# Altium PCB ValkyrieSHD_PCB.PcbDoc
Units mm, origin at the board's own origin, x right, y up, seen from the top; angles counter-clockwise.
Board outline 59.05 x 53.34 mm, 2 copper layers (Top, Bottom), stack 1.669 mm thick; 46 components, 34 nets, 189 pads, 340 vias.
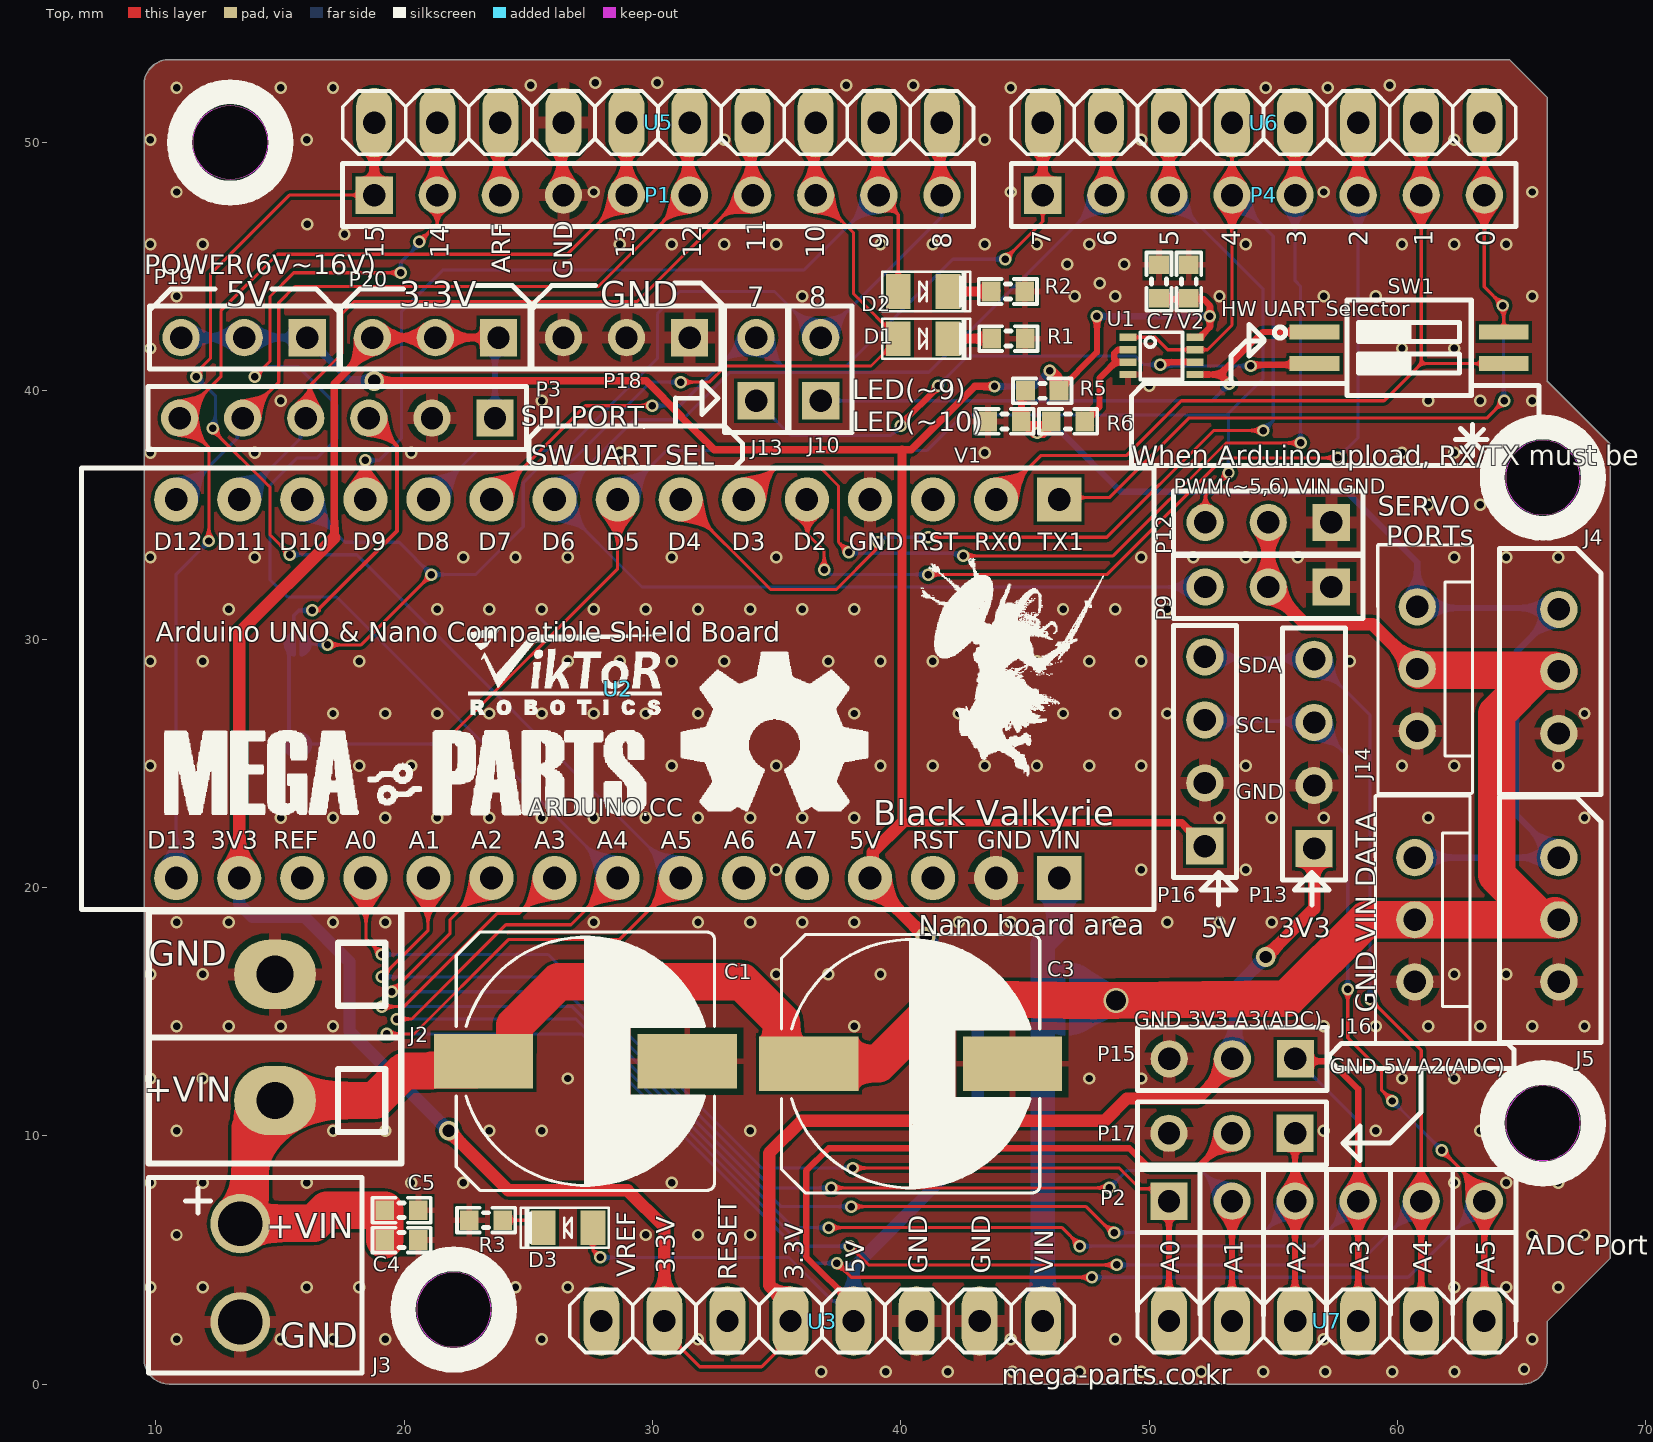
[diagram p0: Top view]
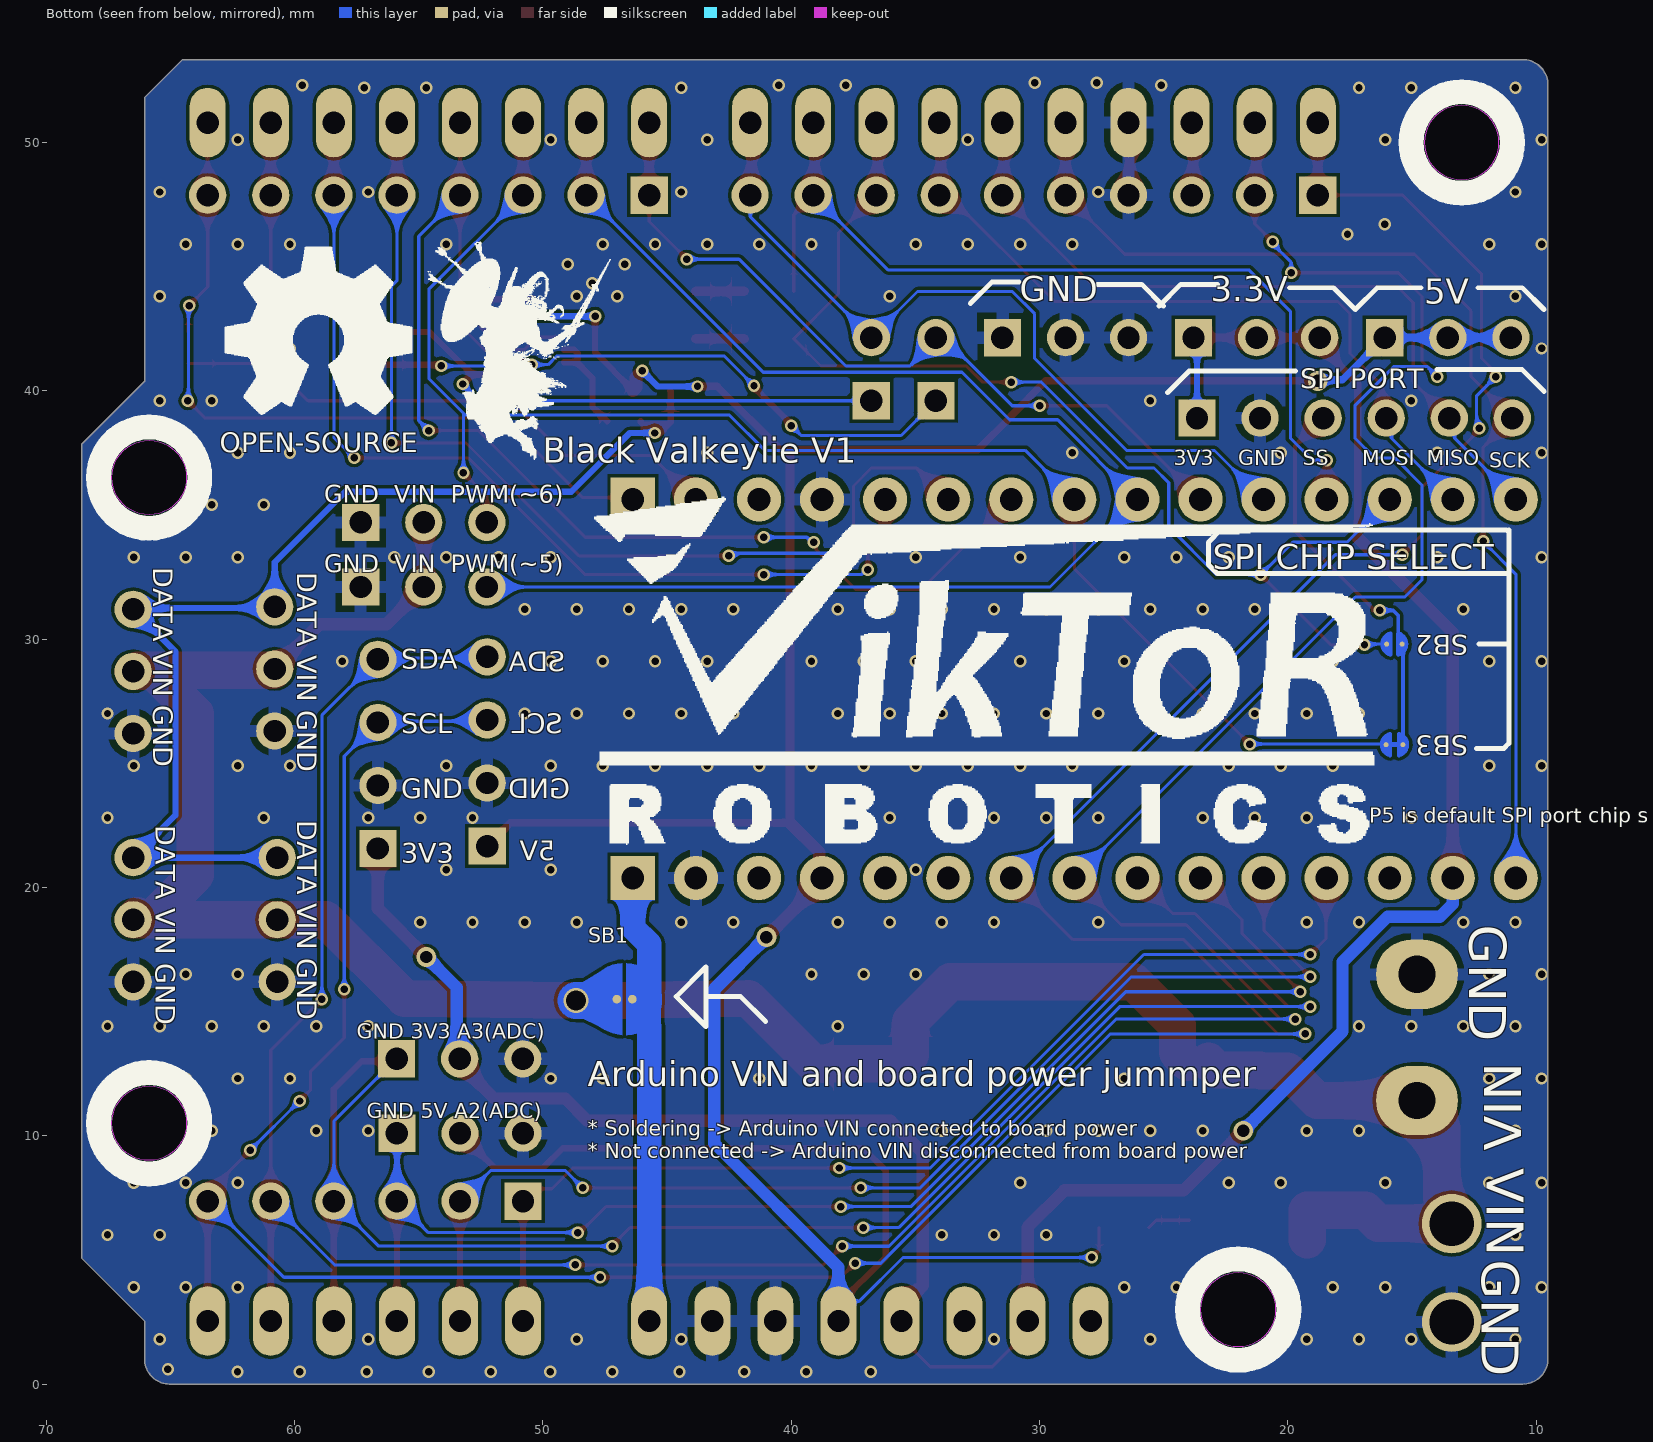
[diagram p1: Bottom view, seen from below]

## Layer stack, top to bottom
Solder Mask Top: solder mask 0.0102, Solder Resist, Dk 3.5
Top: signal copper 0.0343
Dielectric 1: dielectric 1.6, FR-4, Dk 4.3
Bottom: signal copper 0.0343
Solder Mask Bottom: solder mask 0.0102, Solder Resist, Dk 3.5

## Board outline
9.527,1.016 9.527,52.349 9.526,52.324 cw(c10.542,52.324) 10.542,53.34 64.516,53.34 66.04,51.816 66.04,40.386 68.58,37.846 68.58,5.08 66.04,2.54 66.04,1.016 cw(c65.037,1.003) 65.049,0 10.543,0 cw(c10.543,1.016)
cut-out: 13,48.5 cw(c13,50) 11.5,50 cw(c13,50) 13,51.5 cw(c13,50) 14.5,50 cw(c13,50)
cut-out: 20.5,3 ccw(c22,3) 22,1.5 ccw(c22,3) 23.5,3 ccw(c22,3) 22,4.5 ccw(c22,3)
cut-out: 64.358,36.506 ccw(c65.858,36.506) 65.858,35.006 ccw(c65.858,36.506) 67.358,36.506 ccw(c65.858,36.506) 65.858,38.006 ccw(c65.858,36.506)
cut-out: 64.358,10.506 ccw(c65.858,10.506) 65.858,9.006 ccw(c65.858,10.506) 67.358,10.506 ccw(c65.858,10.506) 65.858,12.006 ccw(c65.858,10.506)

## Design rules (kind name [scope] priority, off if disabled: settings)
Clearance "Clearance - Default - DEFAULT - Net" [All] p1: gap=0.127 ignorepadtopadclearanceinfootprint=FALSE except(0: Arc-Text Track-Text SMDPad-Text SMDPad-Hole THPad-Text THPad-Hole Via-Text Via-Hole Fill-Text Poly-Text Region-Text Text-Text Text-Hole)
ComponentClearance "ComponentClearance - Default - DEFAULT" [All] p1: gap=0.152 collisioncheckmode=3 verticalgap=0.254 showdistances=FALSE
FanoutControl Fanout_Small [(CompPinCount < 5)] p3: bgadir=Out bgaviamode=Centered fanoutstyle=Auto fanoutdirection=OutThenIn viagrid=0.025 // Fanout_Small (Default Rule)
FanoutControl Fanout_SOIC [IsSOIC] p4: bgadir=Out bgaviamode=Centered fanoutstyle=Auto fanoutdirection=Alternating viagrid=0.025 // Fanout_SOIC (Default Rule)
HoleSize [All] p1: absolutevalues=TRUE maxlimit=5 minlimit=0.1 maxpercent=80.000 minpercent=20.000
HoleToHoleClearance "HoleToHoleClearance - Default - DEFAULT" [All] p1: gap=0 allowstackedmicrovias=TRUE
Length "Default Length" [All] p1: maxlimit=1270 minlimit=0
MaxMinImpedance "Default Impedance" [All] p1: minimum=50.00 maximum=150.0
MinimumSolderMaskSliver [All] p1: minsoldermaskwidth=0
ParallelSegment "Default Parallel Segment Adjasent" [All] p1: limit=25.4 gap=5.08
ParallelSegment "Default Parallel Segment Same Layer" [All] p2: limit=25.4 gap=5.08
PlaneConnect "Default PlaneConnect" [All] p1: planeconnectstyle=Relief reliefexpansion=0.508 reliefentries=4 reliefconductorwidth=1 reliefairgap=0.254
PolygonConnect "PolygonConnect - Default Pad" [All] p1: thpad.connectstyle=Relief thpad.reliefconductorwidth=0.508 thpad.reliefentries=4 thpad.polygonreliefangle="90 Angle" thpad.airgapwidth=0.254 smdpad.connectstyle=Relief smdpad.reliefconductorwidth=0.254 smdpad.reliefentries=4 smdpad.polygonreliefangle="90 Angle" smdpad.airgapwidth=0.254 via.connectstyle=Direct via.reliefconductorwidth=1 via.reliefentries=4 via.polygonreliefangle="45 Angle" via.airgapwidth=0.254
RoutingLayers "RoutingLayers - Default - DEFAULT" [All] p1: top layer_v5=TRUE bottom layer_v5=TRUE
RoutingPriority "RoutingPriority - Default - DEFAULT" [All] p1: routingpriority=3
RoutingTopology "Default Routing Topology" [All] p1: topology=Shortest
RoutingVias "RoutingVias - Default - DEFAULT" [All] p1: holewidth=0.3 width=0.5 viastyle="Through Hole" minholewidth=0.1 minwidth=0.5 maxholewidth=2 maxwidth=5
SMDToCorner "SMDToCorner - Default - DEFAULT" [All] p1: distance=60000
ShortCircuit [InNet('NetP3_3')] p1: allowed=TRUE
SilkToSilkClearance [All] p1: silktosilkclearance=0
SilkToSolderMaskClearance [IsPad] p1: minsilkscreentomaskgap=0 clearancetoexposedcopper=TRUE
SolderMaskExpansion [All] p1: expansion=0.102 istentingtop=FALSE
Width "Default Width" [All] p1: maxlimit=5 minlimit=0.1 preferedwidth=0.127
17 further rules are at their usual default settings.

## Components (designator, comment, footprint, x,y, rotation, side; value= is the part's Value field where it differs from the comment)
C1 "330uF/35V(10W10.5H)" SMD-C(10.0) 27.3,13 r90 top locked
C3 "330uF/35V(10W10.5H)" SMD-C(10.0) 40.4,12.9 r90 top locked
C4 "CAP-CHIP-2012" CAPC1608X06L 19.9,5.8 r180 top value=100nF/50V
C5 "CAP-CHIP-1005" CAPC1608X06L 19.9,7 r180 top value=100nF/50V
C7 "CAP-CHIP-1005" CAPC1608X06L 50.4,44.4 r270 top value=100nF/50V
D1 "LED(BLUE)1608" LED2012-LJS 40.9,42.1 r0 top
D2 "LED(BLUE)1608" LED2012-LJS 40.9,44 r0 top
D3 "LED(GREEN)1608" LED2012-LJS 26.6,6.3 r180 top
J2 "Header 2" BLOCK-5.08MMX2P 14.8,11.42 r90 top locked
J3 "YAW396-02" NW-VH3.96-2A 13.4,4.48 r270 top value=YAW396-02V
J4 "5268-03A" 5267-03 66.5,28.7 r270 top
J5 "5268-03A" 5267-03 66.5,18.7 r270 top
J10 "JUMPER" HDR1X2 36.775,39.6 r90 top
J13 "JUMPER" HDR1X2 34.175,39.6 r90 top
J14 "JST B3B-EH-A" JST_B3B-EH-A 60.8,28.8 r270 top
J16 "JST B3B-EH-A" JST_B3B-EH-A 60.7,18.7 r270 top
P1 "MHDR1X10" HDR1X10 18.796,47.879 r0 top
P2 "Header 6" HDR1X6 50.8,7.366 r0 top
P3 "Header 6" HDR1X6 23.66,38.9 r180 top
P4 "Header 8" HDR1X8 45.72,47.879 r0 top
P9 "Header 3" HDR1X3 57.34,32.1 r180 top
P12 "Header 3" HDR1X3 57.34,34.7 r180 top
P13 "Header 4" HDR1X4 56.645,21.565 r90 top
P15 "Header 3" HDR1X3 55.892,13.1 r180 top
P16 "Header 4" HDR1X4 52.245,21.665 r90 top
P17 "Header 3" HDR1X3 55.88,10.1 r180 top locked
P18 "Header 3" HDR1X3 31.496,42.14 r180 top
P19 "Header 3" HDR1X3 16.1,42.14 r180 top
P20 "Header 3" HDR1X3 23.798,42.14 r180 top
R1 "1K/1608" RESC1608X06L 44.337,42.1 r180 top
R2 "1K/1608" RESC1608X06L 44.315,44 r180 top
R3 "2K/1608" RESC1608X06L 23.3,6.6 r0 top
R5 "RES-CHIP-1005" RESC1608X06L 45.7,40 r0 top value=10kΩ/1005/J
R6 "33R/1608" RESC1608X06L 46.74,38.769 r180 top
SB1 "Jumper" Solderbridge_3pi 46.4,15.5 r0 bottom (schematic designator W1)
SB2 "Jumper" Solderbridge 16.025,29.8 r180 bottom
SB3 "Jumper" Solderbridge_Shorted 16.045,25.749 r180 bottom
SW1 "SW_DIP-2_0" SW-SMD2P 56.675,42.35 r270 top value="SW DIP-2"
U1 "NC7WZ241" MO-187_0.5_2.0X3.1 49.149,42.156 r270 top
U2 "Arduino Nano As component" ARDUINO_NANO_BOARD 28.6,28 r0 top locked
U3 "J_8X1" J_8X1 36.83,2.54 r0 top locked
U5 "J_10X1" J_10X1 30.226,50.8 r0 top locked
U6 "J_8X1" J_8X1 54.61,50.8 r0 top locked
U7 "J_6X1" J_6X1 57.15,2.54 r0 top locked
V1 "IECS0505C040FR" RESC1608X06L 44.183,38.769 r0 top
V2 "IECS0505C040FR" RESC1608X06L 51.6,44.4 r270 top

## Footprints (in the part's own frame and the unit in brackets; to place one, negate y for a bottom-side part, rotate by r counter-clockwise, add the part's x,y. Pads: shape width x height; smd on the part's side, far side on the other; paste and mask are expansions set on the pad)
5267-03 [mm]
  round 1.5 hole 0.9: 1(-2.5,0) 2(0,0) 3(2.5,0)
  silkscreen extent -4.95,-2.38 4.95,1.7, body extent -4.98,-3.15 4.93,1.76, height 5.95
ARDUINO_NANO_BOARD [mil] "Nano Board as Component"
  rect 70x70 / inner round 64.67 / far side rect 70x70 hole 36: 1(700,-300) 30(700,300)
  round 70 hole 36: 2(600,-300) 3(500,-300) 4(400,-300) 5(300,-300) 6(200,-300) 7(100,-300) 8(0,-300) 9(-100,-300) 10(-200,-300) 11(-300,-300) 12(-400,-300) 13(-500,-300) 14(-600,-300) 15(-700,-300) 16(-700,300) 17(-600,300) 18(-500,300) 19(-400,300) 20(-300,300) 21(-200,300) 22(-100,300) 23(0,300) 24(100,300) 25(200,300) 26(300,300) 27(400,300) 28(500,300) 29(600,300)
  silkscreen extent -850,-350 850,350
BLOCK-5.08MMX2P [mil]
  oval 110x130 hole 59.06: 1(0,0) 2(200,0)
  silkscreen extent -100,-200 300,200, body extent -107,-197 308,205, height 567
CAPC1608X06L [mm]
  rect 0.75x0.8 smd: 1(-0.675,0) 2(0.675,0)
  silkscreen extent -1.17,-0.5 1.17,0.5, body extent -0.8,-0.43 0.8,0.43, height 0.8
HDR1X2 [mm] "Connector; Header; 2 Position"
  rect 1.5x1.5 hole 0.9: 1(0,0)
  round 1.5 hole 0.9: 2(2.54,0)
  silkscreen extent -1.27,-1.27 3.81,1.27
HDR1X3 [mm] "Connector; Header; 3 Position"
  rect 1.5x1.5 hole 0.9: 1(0,0)
  round 1.5 hole 0.9: 2(2.54,0) 3(5.08,0)
  silkscreen extent -1.27,-1.27 6.35,1.27
HDR1X4 [mm] "Connector; Header; 4 Position"
  rect 1.5x1.5 hole 0.9: 1(0,0)
  round 1.5 hole 0.9: 2(2.54,0) 3(5.08,0) 4(7.62,0)
  silkscreen extent -1.27,-1.27 8.89,1.27
HDR1X6 [mm] "Connector; Header; 6 Position"
  rect 1.5x1.5 hole 0.9: 1(0,0)
  round 1.5 hole 0.9: 2(2.54,0) 3(5.08,0) 4(7.62,0) 5(10.16,0) 6(12.7,0)
  silkscreen extent -1.27,-1.27 13.97,1.27
HDR1X8 [mm] "Connector; Header; 8 Position"
  rect 1.5x1.5 hole 0.9: 1(0,0)
  round 1.5 hole 0.9: 2(2.54,0) 3(5.08,0) 4(7.62,0) 5(10.16,0) 6(12.7,0) 7(15.24,0) 8(17.78,0)
  silkscreen extent -1.27,-1.27 19.05,1.27
HDR1X10 [mm] "Connector; Header; 10 Position"
  rect 1.5x1.5 hole 0.9: 1(0,0)
  round 1.5 hole 0.9: 2(2.54,0) 3(5.08,0) 4(7.62,0) 5(10.16,0) 6(12.7,0) 7(15.24,0) 8(17.78,0) 9(20.32,0) 10(22.86,0)
  silkscreen extent -1.27,-1.27 24.13,1.27
J_6X1 [mm]
  oval 1.45x2.8 hole 0.9: 1(-6.35,0) 2(-3.81,0) 3(-1.27,0) 4(1.27,0) 5(3.81,0) 6(6.35,0)
  silkscreen extent -7.62,-1.27 7.62,1.27
J_8X1 [mm]
  oval 1.45x2.8 hole 0.9: 1(-8.89,0) 2(-6.35,0) 3(-3.81,0) 4(-1.27,0) 5(1.27,0) 6(3.81,0) 7(6.35,0) 8(8.89,0)
  silkscreen extent -10.16,-1.27 10.16,1.27
J_10X1 [mm]
  oval 1.45x2.8 hole 0.9: 1(-11.43,0) 2(-8.89,0) 3(-6.35,0) 4(-3.81,0) 5(-1.27,0) 6(1.27,0) 7(3.81,0) 8(6.35,0) 9(8.89,0) 10(11.43,0)
  silkscreen extent -12.7,-1.27 12.7,1.27
JST_B3B-EH-A [mm] "2.5mm pitch"
  round 1.5 hole 0.9: 1(-2.5,0) 2(0,0) 3(2.5,0)
  silkscreen extent -5,-1.6 5.01,2.22, body extent -4.99,-1.6 5.01,2.2, height 6
LED2012-LJS [mm]
  rect 1x1.4 smd: 1(1,0) 2(-1,0)
  silkscreen extent -1.65,-0.8 1.9,0.8, body extent -1.43,-0.65 1.4,0.65, height 1
MO-187_0.5_2.0X3.1 [mm]
  rect 0.3x0.7 smd mask+0.01: 1(0,0) 2(0.5,0) 3(1,0) 4(1.5,0) 5(1.5,2.7) 6(1,2.7) 7(0.5,2.7) 8(0,2.7)
  silkscreen extent -0.2,0.5 1.7,2.2, body extent -0.43,0.35 1.88,2.35, height 0.9
NW-VH3.96-2A [mm]
  round 2.4 hole 1.8: 1(-1.98,0) 2(1.98,0)
  silkscreen extent -3.83,-3.7 4.03,4.9, body extent -3.8,-3.7 4.06,4.9, height 13.7
RESC1608X06L [mm]
  rect 0.75x0.8 smd: 1(-0.675,0) 2(0.675,0)
  silkscreen extent -1.17,-0.5 1.17,0.5, body extent -0.8,-0.48 0.8,0.48, height 0.8
SMD-C(10.0) [mm]
  rect 2.2x4 smd: 1(0,4.1) 2(0,-4.1)
  silkscreen extent -5.2,-5.2 5.2,5.2, body extent -4.25,-4.45 4.05,4.45, height 10.5
Solderbridge [mm]
  round 0.2 smd paste-10: 1(0,0) 2(0.625,0)
  Top region: 0.389,0.432 0.465,0.505 0.583,0.467 0.648,0.424 0.721,0.351 0.775,0.292 0.833,0.193 0.861,0.099 0.856,-0.122 0.831,-0.193 0.747,-0.33 0.663,-0.411 0.571,-0.469 0.47,-0.5 0.419,-0.483 0.389,-0.43
  Top region: 0.236,-0.432 0.16,-0.505 0.042,-0.467 -0.023,-0.424 -0.097,-0.351 -0.15,-0.292 -0.208,-0.193 -0.236,-0.099 -0.231,0.122 -0.206,0.193 -0.122,0.33 -0.038,0.411 0.054,0.469 0.155,0.5 0.206,0.483 0.236,0.43
  Top lines w0.152: 0.465,-0.431 ccw(c0.355,0) 0.582,-0.382 ccw(c0.355,0) 0.774,0.149 ccw(c0.355,0) 0.465,0.431 ; 0.159,-0.431 cw(c0.27,0) -0.175,0 cw(c0.27,0) 0.025,0.371 cw(c0.27,0) 0.159,0.431
Solderbridge_3pi [mm]
  round 0.35 smd paste-10: 1(0,0) 2(0.625,0)
  Top region: 0.215,-1.446 -0.482,-1.232 -0.987,-0.705 -1.172,0.001 -0.989,0.707 -0.486,1.235 0.211,1.451 0.211,1.451 0.215,1.447
  Top region: 0.398,-1.454 0.398,1.439 0.402,1.443 1.099,1.227 1.602,0.699 1.785,-0.007 1.6,-0.713 1.095,-1.24 0.398,-1.454
  Top lines w0.012: 0.211,1.451 ccw(c0.278,0.003) -0.5,1.226 ccw(c0.278,0.003) -0.68,1.091 ccw(c0.278,0.003) -0.68,-1.085 ccw(c0.278,0.003) -0.486,-1.23 ccw(c0.278,0.003) 0.215,-1.446 ; 0.398,-1.454 ccw(c0.335,-0.005) 1.784,0.05 ccw(c0.335,-0.005) 0.402,1.443
  Top lines w0.013: 0.215,1.447 0.215,0.668 0.215,-0.765 0.215,-1.446 ; 0.398,1.439 0.398,-1.454
  Top lines w1: -0.351,0.722 ccw(c0.335,-0.005) -0.425,-0.656 ccw(c0.335,-0.005) -0.315,-0.765 ; 0.937,-0.764 ccw(c0.287,-0.004) 1.284,0.081 ccw(c0.287,-0.004) 0.973,0.724
Solderbridge_Shorted [mm]
  round 0.2 smd paste-10: 1(0,0) 2(0.676,0)
  Top region: 0.44,0.432 0.516,0.505 0.634,0.467 0.699,0.424 0.772,0.351 0.826,0.292 0.884,0.193 0.912,0.099 0.907,-0.122 0.881,-0.193 0.798,-0.33 0.714,-0.411 0.622,-0.469 0.521,-0.5 0.47,-0.483 0.44,-0.43
  Top region: 0.236,-0.432 0.16,-0.505 0.042,-0.467 -0.023,-0.424 -0.097,-0.351 -0.15,-0.292 -0.208,-0.193 -0.236,-0.099 -0.231,0.122 -0.206,0.193 -0.122,0.33 -0.038,0.411 0.054,0.469 0.155,0.5 0.206,0.483 0.236,0.43
  Top lines w0.152: 0.516,-0.431 ccw(c0.406,0) 0.516,0.431 ; 0.159,-0.431 cw(c0.27,0) -0.175,0 cw(c0.27,0) -0.174,0.025 cw(c0.27,0) 0.159,0.431
  Top lines w0.203: 0.676,0 0,0
SW-SMD2P [mm]
  rect 0.6x2 smd: 1(-0.015,-0.01) 2(1.255,-0.01) 3(1.255,7.61) 4(-0.015,7.61)
  silkscreen extent -1.3,-1.62 2.54,6.3

## Part data
C1 C3: library part C_10/16, PCB PartLoc=MM,59.125,55,90,1, PCB RefLoc=MM,7.625,-5.625,180,CC,1.2,1,0.12,std,1
D1 D2 D3: library part D:LED, "LED SMARTLED GREEN 570NM 0603"
J2: "Header, 2-Pin", LatestRevisionDate=17-Jul-2002, LatestRevisionNote="Re-released for DXP Platform.", Publisher="Altium Limited"
J10 J13: library part JUMPER_2P, PCB DECAL=5267-03
J14 J16: library part 5268-03A
P1: "Header, 10-Pin", LatestRevisionDate=17-Jul-2002, LatestRevisionNote="Re-released for DXP Platform.", Publisher="Altium Limited"
P2 P3: "Header, 6-Pin", LatestRevisionDate=17-Jul-2002, LatestRevisionNote="Re-released for DXP Platform.", Publisher="Altium Limited"
P4: "Header, 8-Pin", LatestRevisionDate=17-Jul-2002, LatestRevisionNote="Re-released for DXP Platform.", Publisher="Altium Limited"
P9 P12 P15 P17 P18 P19 P20: "Header, 3-Pin", LatestRevisionDate=17-Jul-2002, LatestRevisionNote="Re-released for DXP Platform.", Publisher="Altium Limited"
P13 P16: "Header, 4-Pin", LatestRevisionDate=17-Jul-2002, LatestRevisionNote="Re-released for DXP Platform.", Publisher="Altium Limited"
R1 R2 R3 R6: library part RES_0603, "Not mounted"
SB1 SB2 SB3: "Jumper Wire", LatestRevisionDate=17-Jul-2002, LatestRevisionNote="Re-released for DXP Platform.", PackageDescription="Radial Cap, Thru-Hole; 2 Leads; 0.2 in Pin Spacing", PackageReference=RAD-0.2, Published=24-Mar-1999, Publisher="Altium Limited"
U2: library part ArduinoNano
U3 U6: library part J_8x1, PCB Footprint=J_8x1
U5: library part J_10x1, PCB Footprint=J_10x1
U7: library part J_6x1, PCB Footprint=J_6x1
V1 V2: library part "DIODE TVS_1"
C4 C5 C7 R5: PCB DECAL=1005, size=1005
J3: PCB DECAL=YAW396-02V
SW1: PCB DECAL=SW-SMD2P, Source_Path=\\192.168.10.135\STAFF2\I13-0002_EM-IMX6\TRUNK\HW\SCH\EM-IMX6-CORE-V10R0(130225).DSN

## Via types
v1: diameter 0.5, hole 0.3, Top to Bottom, tented both sides, 335 vias
v2: diameter 0.8, hole 0.5, Top to Bottom, tented both sides, 4 vias
v3: diameter 1, hole 0.8, Top to Bottom, tented both sides, 1 vias

## Nets (pads, with @x,y where several pads share a name; then routed paths per layer and width w, separated by ;. In a path a pad name is that pad's centre, name@x,y a point inside that pad or via, vN(x,y) a via of type N, cw(c..) or ccw(c..) an arc to the next point about the centre after c; other vN are vias at no path point)
+3V3: P3.1 P13.1 P15.2 P20.1 P20.2 P20.3 U2.14 U3.2 U3.4 | length 105.9
  Top w0.127: U3.2 30.48,2.12 31.9,0.7 34.395,0.7 35.56,1.865 U3.4@35.56,2.203
  Top w0.3: 17.19,34.09 17.19,40.29 18.718,41.818 P20.3 P20.2 P20.1
  Top w0.5: U2.14 13.36,30.26 17.19,34.09 ; v2(21.8,10.2) 24.2,7.8 29,7.8 30.48,6.32 U3.2 ; U3.4@35.56,2.203 U3.4 35.56,3.124 34.7,3.984 34.7,9.3 36,10.6 48.2,10.6 49.1,11.5 51.96,11.5 P15.2@53.46,13 ; v2(54.7,17.2) 56.645,19.145 P13.1
  Bottom w0.254: P3.1 23.66,42.001 P20.1
  Bottom w0.5: U2.14 13.361,20.379 13.361,19.339 13.88,18.82 15.98,18.82 17.8,17 17.8,14.2 v2(21.8,10.2) ; P15.2@53.46,13 53.47,13.01 53.47,15.97 v2(54.7,17.2)
+5V: C7.2 D3.2 P16.1 P17.2 P19.1 P19.2 P19.3 R5.2 U1.8 U2.4 U3.5 V2.2 | length 140.8
  Top w0.127: D3.2 27.6,5.4 v1(27.9,5.1)
  Top w0.254: U3.5 38.1,3.215 36.2,5.115 36.2,8.602 37.098,9.5 49.2,9.5 50,8.7 51.94,8.7 P17.2 ; R5.2 46.375,40.025 47.9,41.55 v1(47.9,43) ; C7.2 50.437,43.688 52.197,43.688 52.451,43.434 v1(52.451,42.996) 52.451,42.558 52.057,42.164 U1.8@52.009,42.164
  Top w0.3: v2(18.8,40.4) 29.745,40.4 31.167,38.978 31.167,38.946 32.493,37.62 40.05,37.62 40.42,37.62 42.975,40.175 v1(43.775,40.175) ; 40.05,22.6 51.31,22.6 P16.1
  Top w0.35: 40.05,22.6 40.05,37.62
  Top w0.5: U2.4 38.871,20.491 38.871,21.421 40.05,22.6 ; U2.4@38.78,20.38 38.78,20.22 v2(41,18)
  Top w0.508: v1(46.002,40.8) 46.254,40.548 46.254,40.121 R5.2
  Bottom w0.127: v1(27.9,5.1) 35.5,5.1 37.259,3.341 37.575,3.341 38.1,2.816 U3.5
  Bottom w0.254: v1(43.775,40.175) 45.377,40.175 v1(46.002,40.8) ; v1(47.9,43) 47.902,42.998 52.449,42.998 v1(52.451,42.996)
  Bottom w0.3: P19.3 P19.2 P19.1 17.8,40.44 18.76,40.44 v2(18.8,40.4)
  Bottom w0.5: U3.5@38.1,2.816 38.1,4.7 43.1,9.7 43.1,10.5
  Bottom w0.508: v2(41,18) 43.1,15.9 43.1,10.5
A0: P2.1 U2.12 U7.1 | length 44
  Top w0.127: U2.12 18.465,20.356 18.465,17.935 v1(19.1,17.3) ; v1(38.072,8.702) 48.798,8.702 49.634,7.866 50.3,7.866 P2.1
  Top w0.254: U7.1 P2.1
  Bottom w0.127: v1(19.1,17.3) 25.8,17.3 34.398,8.702 v1(38.072,8.702)
A1: P2.2 U2.11 U7.2 | length 48.1
  Top w0.127: v1(19.1,16.4) 20.956,18.256 20.956,20.356 U2.11 ; v1(37.198,7.902) 37.199,7.901 v1(48.4,7.9) v1(48.4,7.9)
  Top w0.254: U7.2 P2.2
  Bottom w0.127: v1(19.1,16.4) 26.3,16.4 34.798,7.902 v1(37.198,7.902) ; v1(48.4,7.9) 49.1,8.6 52.106,8.6 P2.2
A2: P2.3 P17.1 U2.10 U7.3 | length 57.5
  Top w0.127: v1@19.501,15.801 21.851,18.151 21.851,18.711 U2.10 ; v1(38,7.147) 47.467,7.147 48.514,6.1 v1(48.6,6.1)
  Top w0.254: U7.3 P2.3 P17.1
  Bottom w0.127: v1(19.5,15.8) 26.537,15.8 35.19,7.147 v1(38,7.147) ; v1(48.6,6.1) 54.614,6.1 P2.3
  Bottom w0.254: P2.3 P17.1
A3: P2.4 P15.1 U2.9 U7.4 | length 72.1
  Top w0.127: v1(19.1,15.2) 19.99,15.2 23.737,18.947 24.627,18.947 U2.9 ; v1(37.1,6.3) 46.5,6.3 47.2,5.6 v1(47.2,5.555)
  Top w0.254: P15.1@56,13 57.3,13 58.42,11.88 P2.4 U7.4
  Bottom w0.127: v1(19.1,15.2) 26.778,15.2 35.678,6.3 v1(37.1,6.3) ; v1(47.2,5.555) 56.609,5.555 P2.4 58.42,10.58 P15.1@56,13
A4: P1.2 P2.5 P13.4 P16.4 U2.8 U5.2 U7.5 | length 137.9
  Top w0.127: v1(13.985,40.57) 14.6,41.185 14.6,43.799 15.554,44.753 v1(19.868,44.753) ; v1(19.7,14.7) 20.3,14.7 24.1,18.5 26.72,18.5 U2.8 ; v1(20.613,45.999) 21.336,46.722 v1(21.336,47.879) ; v1(37.947,5.553) 38.7,4.8 v1(48.7,4.8) ; v1(58.9,15.5) 60.96,13.44 P2.5
  Top w0.254: U7.5 P2.5
  Top w0.381: P1.2@21.273,48.069 21.273,50.736 U5.2
  Bottom w0.127: v1(13.985,40.57) 14.396,40.981 15.719,40.981 17.3,39.4 17.3,38.1 16.5,37.3 15.7,37.3 14.6,36.2 14.6,32.388 15.29,31.698 17.282,31.698 U2.8 ; v1(19.7,14.7) 26.918,14.7 36.066,5.553 v1(37.947,5.553) ; v1(19.868,44.753) 19.87,44.755 19.87,45.17 20.613,45.913 v1(20.613,45.999) ; v1(48.7,4.8) 58.394,4.8 P2.5 ; P16.4 52.295,29.235 56.595,29.235 58.9,26.93 v1(58.9,15.5)
A5: P1.1 P2.6 P13.3 P16.3 U2.7 U5.1 U7.6 | length 140.7
  Top w0.127: v1(11.631,40.57) 11.47,40.57 12.2,41.3 12.2,44.7 15.379,47.879 P1.1 ; v1(12.3,38.5) 12.3,38.414 14.6,36.114 14.6,34.2 v1(15.4,33.4) ; v1(19.3,14.1) 20.4,14.1 24.2,17.9 28.66,17.9 U2.7 ; v1(37.431,4.869) 38,4.3 v1(47.7,4.3) ; v1(58,15.9) 58,13.946 59.364,12.582 59.364,11.836 v1(59.8,11.4) ; v1(61.793,9.41) 63.5,7.703 P2.6
  Top w0.254: U7.6 P2.6
  Top w0.381: P1.1@18.669,48.006 18.796,48.133 U5.1
  Bottom w0.127: v1(11.631,40.57) v1(11.631,40.57) 12.4,39.8 12.4,38.6 v1(12.3,38.5) ; v1(15.4,33.4) 18.086,33.4 31.106,20.38 U2.7 ; v1(19.3,14.1) 27.159,14.1 36.39,4.869 v1(37.431,4.869) ; v1(47.7,4.3) 60.434,4.3 P2.6 ; P16.3 52.295,26.695 56.595,26.695 P13.3 58,25.29 v1(58,15.9) ; v1(59.8,11.4) 59.803,11.4 v1(61.793,9.41)
ARD_VIN: SB1.1 U2.1 U3.8 | length 17.5
  Top w1: U3.8@45.725,2.54 45.725,2.263 U3.8@45.928,2.06
  Bottom w1: U3.8 45.72,14.409 ; 45.975,16.156 45.72,15.901 45.72,16.585 45.72,17.72 46.38,18.38 U2.1
AREF: P1.3 U5.3 | length 2.8
  Top w0.381: P1.3@23.749,48.006 23.812,48.069 23.812,50.736 U5.3
DATA: J4.1 J5.1 J14.1 J16.1 R5.1 R6.2 V1.2 | length 45.1
  Top w0.254: R5.1@44.875,40 44.858,39.983 V1.2 44.858,38.744 45.255,38.347 45.453,38.347 v1(45.5,38.3) 45.547,38.347 45.668,38.347 46.065,38.744 R6.2
  Bottom w0.254: v1(45.5,38.3) 46.5,38.3 48.861,35.939 57.961,35.939 60.8,33.099 J14.1 60.85,31.25 66.45,31.25 J4.1 64.8,29.5 64.8,22.9 J5.1 J16.1
GND: C1.2 C3.2 C4.1 C5.1 C7.1 J2.2 J3.2 J4.3 J5.3 J14.3 J16.3 P1.4 P3.2 P9.1 P12.1 P13.2 P15.3 P16.2 P17.3 P18.1 P18.2 P18.3 R1.1 R2.1 R3.1 U1.4 U2.2 U2.27 U3.6 U3.7 U5.4 V1.1 V2.1 | length 2.8
  Top w0.381: P1.4@26.289,48.006 26.352,48.069 26.352,50.736 U5.4
  other v1: 36.8,0.5 39.4,0.5 41.9,0.5 44.5,0.5 47.2,0.5 49.7,0.5 52.1,0.5 54.6,0.5 57.1,0.5 59.8,0.5 62.3,0.5 65.1,0.6 10.835,1.805 15.035,1.805 17.135,1.805 19.235,1.805 25.535,1.805 31.835,1.805 44.435,1.805 48.635,1.805 57.035,1.805 65.435,1.805 9.785,3.905 11.885,3.905 16.085,3.905 18.185,3.905 20.285,3.905 24.485,3.905 26.585,3.905 62.285,3.905 64.385,3.905 66.485,3.905 10.835,6.005 29.735,6.005 31.835,6.005 33.935,6.005 65.435,6.005 67.535,6.005 9.785,8.105 11.885,8.105 16.085,8.105 20.285,8.105 22.385,8.105 30.785,8.105 62.285,8.105 64.385,8.105 66.485,8.105 10.835,10.205 17.135,10.205 19.235,10.205 23.435,10.205 25.535,10.205 27.635,10.205 29.735,10.205 33.935,10.205 57.035,10.205 59.135,10.205 63.335,10.205 9.785,12.305 11.885,12.305 26.585,12.305 41.285,12.305 47.585,12.305 49.685,12.305 60.185,12.305 62.285,12.305 64.385,12.305 66.485,12.305 10.835,14.405 12.935,14.405 15.035,14.405 17.135,14.405 38.135,14.405 57.035,14.405 59.135,14.405 61.235,14.405 63.335,14.405 65.435,14.405 67.535,14.405 9.785,16.505 11.885,16.505 34.985,16.505 37.085,16.505 39.185,16.505 62.285,16.505 64.385,16.505 10.835,18.605 12.935,18.605 17.135,18.605 19.235,18.605 27.635,18.605 31.835,18.605 33.935,18.605 36.035,18.605 38.135,18.605 42.335,18.605 44.435,18.605 48.635,18.605 50.735,18.605 52.835,18.605 54.935,18.605 34.985,20.705 49.685,20.705 53.885,20.705 15.035,22.805 17.135,22.805 19.235,22.805 21.335,22.805 23.435,22.805 25.535,22.805 27.635,22.805 29.735,22.805 31.835,22.805 33.935,22.805 36.035,22.805 38.135,22.805 52.835,22.805 54.935,22.805 57.035,22.805 61.235,22.805 67.535,22.805 9.785,24.905 11.885,24.905 18.185,24.905 20.285,24.905 22.385,24.905 28.685,24.905 30.785,24.905 32.885,24.905 34.985,24.905 37.085,24.905 39.185,24.905 41.285,24.905 43.385,24.905 45.485,24.905 47.585,24.905 49.685,24.905 53.885,24.905 60.185,24.905 62.285,24.905 66.485,24.905 17.135,27.005 19.235,27.005 21.335,27.005 23.435,27.005 25.535,27.005 27.635,27.005 29.735,27.005 31.835,27.005 33.935,27.005 36.035,27.005 38.135,27.005 42.335,27.005 44.435,27.005 46.535,27.005 48.635,27.005 50.735,27.005 67.535,27.005 9.785,29.105 11.885,29.105 18.185,29.105 26.585,29.105 28.685,29.105 30.785,29.105 32.885,29.105 34.985,29.105 37.085,29.105 39.185,29.105 41.285,29.105 43.385,29.105 45.485,29.105 47.585,29.105 49.685,29.105 58.085,29.105 12.935,31.205 21.335,31.205 23.435,31.205 25.535,31.205 27.635,31.205 29.735,31.205 31.835,31.205 33.935,31.205 36.035,31.205 38.135,31.205 42.335,31.205 44.435,31.205 46.535,31.205 48.635,31.205 50.735,31.205 9.785,33.305 13.985,33.305 22.385,33.305 24.485,33.305 26.585,33.305 30.785,33.305 34.985,33.305 49.685,33.305 51.785,33.305 53.885,33.305 55.985,33.305 62.285,33.305 64.385,33.305 66.485,33.305 61.235,35.405 63.335,35.405 67.535,35.405 9.785,37.505 13.985,37.505 20.285,37.505 28.685,37.505 43.385,37.505 60.185,37.505 62.285,37.505 15.035,39.605 25.535,39.605 61.235,39.605 63.335,39.605 65.435,39.605 50,40.2 9.785,41.705 60.185,41.705 62.285,41.705 10.835,43.805 36.035,43.805 47,43.8 48.635,43.805 52.835,43.805 57.035,43.805 59.135,43.805 65.435,43.805 48.006,44.323 46.7,45.1 49,45.1 9.785,45.905 11.885,45.905 28.685,45.905 30.785,45.905 32.885,45.905 34.985,45.905 39.185,45.905 41.285,45.905 43.385,45.905 45.485,45.905 47.585,45.905 53.885,45.905 60.185,45.905 62.285,45.905 64.385,45.905 17.6,46.3 16.1,46.7 10.835,48.005 12.935,48.005 27.635,48.005 44.435,48.005 57.035,48.005 65.435,48.005 9.785,50.105 16.085,50.105 32.885,50.105 43.385,50.105 49.685,50.105 62.285,50.105 10.835,52.205 12.935,52.205 15.035,52.205 17.135,52.205 44.435,52.205 54.7,52.2 57.2,52.2 25.1,52.3 37.8,52.3 40.5,52.3 59.7,52.3 27.7,52.4 30.2,52.4
NetD1_1: D1.1 R1.2 | length 1.9
  Top w0.381: D1.1 R1.2@43.837,42.1
NetD2_1: D2.1 R2.2 | length 1.9
  Top w0.381: D2.1 R2.2@43.837,44
NetD3_1: D3.1 R3.2 | length 1.7
  Top w0.127: R3.2 25.3,6.6 D3.1
NetP3_3: P3.3 SB2.2 SB3.2 | length 14.7
  Top w0.152: 16.575,31.156 16.575,31.225 19.71,34.36 19.71,37.784 18.594,38.9 P3.3
  Bottom w0.152: 15.343,29.418 15.369,29.391 SB3.2 ; 15.559,30.231 15.559,30.959 15.756,31.156 v1(16.3,31.156)
NetR6_1: R6.1 U1.2 U1.3 | length 4.4
  Top w0.254: R6.1 48.006,39.36 48.006,40.515 48.647,41.156 ; U1.3 48.647,41.156 ; U1.2 48.749,41.656 48.6,41.507 48.6,41.297 48.647,41.251 48.647,41.156
P0: P4.8 SW1.4 U2.30 U6.8 | length 32.4
  Top w0.127: U2.30@46.009,35.7 48.4,35.7 51.6,38.9 63.6,38.9 v1(64.3,39.6) ; P4.8 63.5,46.013 63.5,44.184 v1(64.25,43.434) 64.285,43.399 SW1.4 ; P4.8@63.5,48.006 U6.8
  Bottom w0.127: v1(64.25,43.434) 64.275,43.409 64.275,39.625 v1(64.3,39.6)
P1: P4.7 SW1.3 U2.29 U6.7 | length 32.4
  Top w0.127: U2.29 43.875,35.62 45.655,37.4 49.1,37.4 51.3,39.6 59.465,39.6 60.96,41.095 ; P4.7 60.96,41.095 ; SW1.3 60.96,41.095
  Top w0.381: P4.7 U6.7
P2: P4.6 U2.26 U6.6 | length 39.5
  Top w0.127: U2.26 36.244,35.596 36.244,34.219 36.916,33.548 v1(36.916,32.8) ; v1(41.1,32.6) 48.3,32.6 53,37.3 v1(57.6,37.3)
  Top w0.381: P4.6@58.42,48.006 U6.6
  Bottom w0.127: v1(36.916,32.8) 36.977,32.8 37.177,32.6 v1(41.1,32.6) ; v1(57.6,37.3) 58.42,38.12 P4.6
P3: P4.5 U2.25 U6.5 | length 40.5
  Top w0.127: U2.25 34.95,36.89 36.771,36.89 37.494,36.167 37.494,33.906 v1(37.9,33.5) ; v1(42.516,33.353) 48.553,33.353 53.1,37.9 v1(56.1,37.9)
  Top w0.381: P4.5@55.88,48.006 U6.5
  Bottom w0.127: v1(37.9,33.5) 37.94,33.46 42.309,33.46 42.415,33.353 v1(42.516,33.353) ; P4.5 55.88,44.432 56.1,44.212 v1(56.1,37.9)
P4: P4.4 U1.1 U1.7 U2.24 U6.4 | length 50.9
  Top w0.127: U2.24 34.76,32 37.4,32 39,33.6 39,33.8 v1(39.1,33.9) ; v1(41.1,34.1) 48.3,34.1 52.6,38.4 v1(54.6,38.4) ; U1.1 50.249,42.156 50.749,41.656 52.351,41.656 53.34,42.645 P4.4 ; P4.4@53.34,48.006 U6.4
  Bottom w0.127: v1(39.1,33.9) 39.161,33.9 39.361,34.1 v1(41.1,34.1) ; P4.4 55,46.219 55,38.8 v1(54.6,38.4)
P5: P4.3 P12.3 SB3.1 U2.23 U6.3 | length 62.8
  Top w0.127: v1(21.543,25.775) 28.6,32.832 U2.23 ; P12.3 52.271,34.711 52.271,35.771 v1(53.2,36.7)
  Top w0.381: P4.3@50.8,48.006 U6.3
  Bottom w0.127: SB3.1 16.07,25.775 16.219,25.775 v1(21.543,25.775) ; U2.23 30.58,37.6 41.063,37.6 42.491,39.027 53.109,39.027 ; P4.3 54.591,44.088 54.591,40.496 53.122,39.027 ; v1(53.2,36.7) 53.2,39.088
P6: P4.2 P9.3 U2.22 U6.2 | length 57.7
  Top w0.381: P4.2@48.26,48.006 U6.2
  Bottom w0.127: U2.22 29.273,38.833 31.211,38.833 33.124,40.746 41.127,40.746 P4.2 ; U2.22 29.58,32.1 P9.3
P7: J13.2 P4.1 U2.21 U6.1 | length 31
  Top w0.127: U2.21@24.07,36.17 27.3,39.4 v1(30,39.4) ; v1(44.2,45.3) 45.72,46.82 P4.1
  Top w0.381: P4.1 U6.1
  Bottom w0.127: v1(30,39.4) 31.1,39.4 33.84,42.14 J13.2 34.175,42.04 35.215,41 37.8,41 42.1,45.3 v1(44.2,45.3)
P8: J10.2 P1.10 U2.20 U5.10 | length 31.7
  Top w0.381: P1.10@41.529,48.006 41.593,48.069 41.593,50.736 U5.10
  Bottom w0.127: U2.20 22.954,37.594 26.494,37.594 30.2,41.3 30.2,43.1 31.1,44 34.915,44 J10.2 41.648,47.013 41.648,47.871 P1.10
P9: D2.2 P1.9 U2.19 U5.9 | length 36.7
  Top w0.127: U2.19 v1(18.44,37.2) ; P1.9 39.9,47.095 D2.2
  Top w0.381: P1.9@38.989,48.006 39.052,48.069 39.052,50.736 U5.9
  Bottom w0.127: v1(18.44,37.2) 19,37.2 19.9,38.1 19.9,43.2 21.571,44.871 36.108,44.871 P1.9
P10: D1.2 P1.8 SB2.1 U2.18 U5.8 | length 46.5
  Top w0.127: v1@17.089,29.769 18.269,29.769 v1(21.1,32.6) ; v1(31.14,40.35) 32.295,40.35 32.946,41 38.8,41 D1.2 38.1,43.9 38.1,46.355 P1.8 P1.8@36.449,48.006
  Top w0.381: P1.8@36.449,48.006 36.512,48.069 36.512,50.736 U5.8
  Bottom w0.127: U2.18 17.62,33.9 19.8,33.9 v1(21.1,32.6) 22.873,32.6 24.797,34.524 24.797,36.297 25.39,36.89 26.464,36.89 29.924,40.35 v1(31.14,40.35) ; SB2.1@15.925,29.8 16.099,29.8 16.783,29.8 v1@16.814,29.769
  other v1: 16.914,29.769
P11: P1.7 P3.4 U2.17 U5.7 | length 30.6
  Top w0.127: P3.4 16.202,39.062 16.202,40.202 17.5,41.5 17.5,43.1 18,43.6 29.4,43.6 33.679,47.879 P1.7
  Top w0.381: P1.7@33.909,48.006 33.972,48.069 33.972,50.736 U5.7
  Bottom w0.127: U2.17 15.826,38.086 15.826,38.686 P3.4
P12: P1.6 P3.5 U2.16 U5.6 | length 30.8
  Top w0.127: P3.5 14.95,40.35 14.95,43.55 15.6,44.2 27.817,44.2 P1.6
  Top w0.381: P1.6@31.369,48.006 31.432,48.069 31.432,50.736 U5.6
  Bottom w0.127: U2.16 13.286,38.086 13.286,38.686 P3.5
P13: P1.5 P3.6 U2.15 U5.5 | length 45.7
  Top w0.127: v1(12.137,33.952) 12.137,37.723 P3.6 12.619,40.559 12.619,43.219 14.9,45.5 26.577,45.5 P1.5
  Top w0.381: P1.5@28.829,48.006 28.956,48.133 U5.5
  Bottom w0.127: U2.15 10.82,32.62 12.1,33.9 12.1,33.915 v1(12.137,33.952)
UART_RX: J13.1 SW1.2 U1.6 | length 26.1
  Top w0.254: v1(40,38.6) 40,38.65 41.5,40.15 v1(41.5,40.2) ; v1(50.444,41.053) 50.511,41.053 50.614,41.156 U1.6 ; v1(54.1,41) 54.148,41.047 56.617,41.047 SW1.2
  Bottom w0.127: J13.1 35.575,38.2 39.6,38.2 v1(40,38.6) ; v1(41.5,40.2) 42.7,41.4 49.442,41.4 49.789,41.053 v1(50.444,41.053) 50.492,41.006 50.665,41.006 50.671,41 v1(54.1,41)
UART_TX: J10.1 SW1.1 U1.5 | length 22.8
  Top w0.254: U1.5 52.844,40.656 ; v1(53.225,40.275) 52.844,40.656 ; SW1.1 54.565,42.365 53.225,41.025 53.213,41.025 52.844,40.656
  Bottom w0.127: J10.1 52.55,39.6 v1(53.225,40.275)
VIN: C1.1 C3.1 C4.2 C5.2 J2.1 J3.1 J4.2 J5.2 J14.2 J16.2 P9.2 P12.2 SB1.2 | length 100.3
  Top w0.508: P12.2 P9.2 54.806,32.1 56.306,30.6 59,30.6 J14.2 J14.2@60.852,28.748
  Top w1.5: J2.1@14.546,11.42 18.82,11.42 20.013,12.613 21.071,12.613 21.108,12.65 22.85,12.65 C1.1 ; J2.1 14.8,11.324 13.8,10.324 13.8,7.496 13.572,7.269 13.572,6.632 J3.1 13.414,6.474 16.362,6.474 16.888,7 C5.2 C4.2 ; C1.1@24.048,12.948 24.45,13.35 24.45,14.45 26.2,16.2 33.6,16.2 35.2,14.6 35.2,13.25 35.55,12.9 C3.1 39.1,12.9 41.732,15.532 47.753,15.439 v3(48.67,15.45) 55.572,15.532 58.74,18.7 J16.2 J5.2 ; J14.2@60.852,28.748 J4.2@66.317,28.748 ; J5.2@65.8,18.7 64,20.5 64,27 65.7,28.7 J4.2 ; J5.2@66.173,18.7 J5.2@66.337,18.863
  Bottom w1: J2.1@14.546,11.42 J2.1 ; 47.684,15.419 47.715,15.45 v3@48.184,15.45
  Bottom w1.5: v3@48.184,15.45 v3(48.67,15.45)
pads on no net: U2.3 U2.5 U2.6 U2.13 U2.28 U3.1 U3.3

## Polygon pours and split planes (outlines as drawn)
GND on Top "GND_L01_P000" (solid, pour order 0): 9.527,1.016 9.527,52.349 9.526,52.324 cw(c10.542,52.324) 10.542,53.34 64.516,53.34 66.04,51.816 66.04,40.386 68.58,37.846 68.58,5.08 66.04,2.54 66.04,1.016 cw(c65.037,1.003) 65.049,0 10.543,0 cw(c10.543,1.016)
GND on Bottom "GND_L02_P001" (solid, pour order 1): 9.527,1.016 9.527,52.349 9.526,52.324 cw(c10.542,52.324) 10.542,53.34 64.516,53.34 66.04,51.816 66.04,40.386 68.58,37.846 68.58,5.08 66.04,2.54 66.04,1.016 cw(c65.037,1.003) 65.049,0 10.543,0 cw(c10.543,1.016)

## Other copper
Top:
  pour cut-out: 13.118,40.87 12.376,40.128 12.376,39.824 13.326,39.824 13.5,39.65 13.713,39.863 13.713,40.842 13.057,40.842 13.03,40.87
  region net DATA: 45.69,38.769 45.022,38.769 45.022,38.369 45.291,38.1 45.796,38.1 46.065,38.369 46.065,38.744

## Silkscreen, mask and mechanical layers (free items; w line width, h text height)
Silkscreen Top:
  drawing of 5314 lines, arcs and shapes, not listed
  text "7" at 46.05,45.831 h0.75 r90
  text "6" at 48.675,45.831 h0.75 r90
  text "5" at 51.175,45.831 h0.75 r90
  text "4" at 53.675,45.831 h0.75 r90
  text "3" at 56.3,45.831 h0.75 r90
  text "2" at 58.8,45.831 h0.75 r90
  text "1" at 61.425,45.831 h0.75 r90
  text "0" at 63.925,45.831 h0.75 r90
  text "9" at 39.497,45.72 h0.75 r90
  text "8" at 42.037,45.72 h0.75 r90
  text "11" at 34.544,45.593 h0.75 r90
  text "15" at 19.175,45.337 h0.75 r90
  text "14" at 21.8,45.337 h0.75 r90
  text "13" at 29.275,45.337 h0.75 r90
  text "12" at 31.975,45.337 h0.75 r90
  text "10" at 36.925,45.337 h0.75 r90
  text "ARF" at 24.275,44.737 h0.75 r90
  text "POWER(6V~16V)" at 9.527,44.7 h0.8
  text "GND" at 26.775,44.487 h0.75 r90
  text "5V" at 12.827,43.41 h1
  text "3.3V" at 19.8,43.41 h1
  text "GND" at 27.908,43.41 h1
  text "7" at 33.826,43.41 h0.8
  text "8" at 36.312,43.41 h0.8
  text "HW UART Selector" at 52.9,43 h0.6
  text "LED(~9)" at 38.045,39.664 h0.8
  text "SPI PORT" at 24.7,38.6 h0.8
  text "LED(~10)" at 38.045,38.366 h0.8
  text "SW UART SEL" at 25.105,37.019 h0.8
  text "When Arduino upload, RX/TX must be disconnected!" at 49.3,37.001 h0.8
  text "PWM(~5,6) VIN GND" at 50.99,35.861 h0.6
  text "SERVO /  PORTs" at 59.2,33.775 h0.8
  text "Arduino UNO & Nano Compatible Shield Board" at 10,29.9 h0.8
  text "SDA" at 53.615,28.639 h0.6
  text "SCL" at 53.515,26.239 h0.6
  text "GND" at 53.515,23.556 h0.6
  text "Black Valkyrie" at 38.9,22.5 h1
  text "Nano board area" at 40.725,18.1 h0.8
  text "5V" at 52.1,18 h0.8
  text "3V3" at 55.2,18 h0.8
  text "GND" at 9.72,16.843 h1
  text "GND VIN DATA" at 59.113,14.944 h0.8 r90
  text "GND 3V3 A3(ADC)" at 49.4,14.4 h0.6
  text "GND 5V A2(ADC)" at 57.27,12.5 h0.6
  text "+VIN" at 9.527,11.365 h1
  text "+VIN" at 14.442,5.865 h1
  text "ADC Ports" at 65.2,5.2 h0.8
  text "3.3V" at 30.905,4.445 h0.75 r90
  text "5V" at 38.525,4.445 h0.75 r90
  text "GND" at 41.065,4.445 h0.75 r90
  text "GND" at 43.605,4.445 h0.75 r90
  text "VIN" at 46.145,4.445 h0.75 r90
  text "A0" at 51.225,4.445 h0.75 r90
  text "A1" at 53.765,4.445 h0.75 r90
  text "A2" at 56.305,4.445 h0.75 r90
  text "A3" at 58.845,4.445 h0.75 r90
  text "A4" at 61.385,4.445 h0.75 r90
  text "A5" at 63.925,4.445 h0.75 r90
  text "VREF" at 29.3,4.3 h0.75 r90
  text "RESET" at 33.4,4.191 h0.75 r90
  text "3.3V" at 36.068,4.191 h0.75 r90
  text "GND" at 15,1.471 h1
  text "mega-parts.co.kr" at 44.075,0 h0.8
Silkscreen Bottom:
  drawing of 3343 lines, arcs and shapes, not listed
  text "3.3V" at 23.1,43.6 h1
  text "GND" at 30.8,43.6 h1
  text "5V" at 14.5,43.5 h1
  text "SPI PORT" at 19.5,40.1 h0.8
  text "OPEN-SOURCE" at 63.023,37.522 h0.8
  text "Black Valkeylie V1" at 50,37.1 h1
  text "MISO" at 14.4,37 h0.6
  text "MOSI" at 17,37 h0.6
  text "SS" at 19.4,37 h0.6
  text "GND" at 22,37 h0.6
  text "3V3" at 24.6,37 h0.6
  text "SCK" at 11.9,36.9 h0.6
  text "GND  VIN  PWM(~6)" at 58.8,35.5 h0.7
  text "DATA VIN GND" at 65.7,32.9 h0.8 r90
  text "SPI CHIP SELECT" at 23.018,32.818 h1
  text "GND  VIN  PWM(~5)" at 58.8,32.7 h0.7
  text "DATA VIN GND" at 59.9,32.7 h0.8 r90
  text "SDA" at 55.7,28.8 h0.8
  text "SDA" at 49.1,28.7 h0.8
  text "SCL" at 49.2,26.2 h0.8
  text "SCL" at 55.7,26.2 h0.8
  text "GND" at 48.9,23.6 h0.8
  text "GND" at 55.7,23.6 h0.8
  text "DATA VIN GND" at 59.9,22.7 h0.8 r90
  text "P5 is default SPI port chip select" at 16.733,22.606 h0.6
  text "DATA VIN GND" at 65.6,22.5 h0.8 r90
  text "5V" at 49.5,21.1 h0.8
  text "3V3" at 55.7,21 h0.8
  text "GND" at 12.7,18.5 h1.5 r90
  text "GND 3V3 A3(ADC)" at 57.5,13.9 h0.6
  text "Arduino VIN and board power jummper" at 48.2,12 h1
  text "GND 5V A2(ADC)" at 57.1,10.7 h0.6
  text "VIN" at 10.6,9.4 h1.5 r270
  text "* Soldering -> Arduino VIN connected to board power / * Not connected -> Arduino VIN disconnected from board power" at 48.2,9.1 h0.6
  text "VIN" at 12,8.7 h1.5 r90
  text "GND" at 12.187,5.005 h1.5 r90
Drill Drawing:
  circle w0.012: c13,50 r1.5
  circle w0.012: c65.858,36.506 r1.5
  circle w0.012: c65.858,10.506 r1.5
  circle w0.012: c22,3 r1.5
  lines w0.1: 9.526,52.324 cw(c10.542,52.324) 10.542,53.34 64.516,53.34 66.04,51.816 66.04,40.386 68.58,37.846 68.58,5.08 66.04,2.54 66.04,1.016 cw(c65.037,1.003) 65.049,0 ; 9.527,52.349 9.527,1.016 ccw(c10.543,1.016) 10.543,0 65.049,0
  text ".LEgend" at 79.833,3.88 h1.5

## Text inside footprints (layer, text, board x,y; h text height)
U2: Silkscreen Top "D9" at 17.925,33.573 h0.7; Silkscreen Top "D5" at 28.136,33.573 h0.7; Silkscreen Top "D12" at 9.924,33.573 h0.7; Silkscreen Top "D11" at 12.464,33.573 h0.7; Silkscreen Top "D8" at 20.491,33.573 h0.7; Silkscreen Top "D7" at 22.98,33.573 h0.7; Silkscreen Top "D6" at 25.545,33.573 h0.7; Silkscreen Top "D4" at 30.625,33.573 h0.7; Silkscreen Top "D3" at 33.191,33.573 h0.7; Silkscreen Top "D2" at 35.68,33.573 h0.7; Silkscreen Top "GND" at 37.915,33.573 h0.7; Silkscreen Top "RX0" at 42.97,33.573 h0.7; Silkscreen Top "TX1" at 45.51,33.573 h0.7; Silkscreen Top "D10" at 14.979,33.573 h0.7; Silkscreen Top "RST" at 40.455,33.573 h0.7; Silkscreen Top "A0" at 17.629,21.548 h0.7; Silkscreen Top "A4" at 27.763,21.548 h0.7; Silkscreen Top "5V" at 37.923,21.548 h0.7; Silkscreen Top "3V3" at 12.219,21.548 h0.7; Silkscreen Top "D13" at 9.653,21.548 h0.7; Silkscreen Top "A2" at 22.709,21.548 h0.7; Silkscreen Top "A1" at 20.194,21.548 h0.7; Silkscreen Top "A5" at 30.329,21.548 h0.7; Silkscreen Top "A3" at 25.249,21.548 h0.7; Silkscreen Top "A7" at 35.383,21.548 h0.7; Silkscreen Top "A6" at 32.869,21.548 h0.7; Silkscreen Top "VIN" at 45.594,21.548 h0.7; Silkscreen Top "GND" at 43.08,21.548 h0.7; Silkscreen Top "RST" at 40.463,21.548 h0.7; Silkscreen Top "REF" at 14.733,21.548 h0.7; Silkscreen Top "ARDUINO.CC" at 25.012,22.858 h0.7